# Altium PCB smartTarget.PcbDoc
Units mil, origin at the board's own origin, x right, y up, seen from the top; angles counter-clockwise.
Board outline 1968.5 x 1968.5 mil, 2 copper layers (Top Layer, Bottom Layer); 38 components, 26 nets, 135 pads, 256 vias.
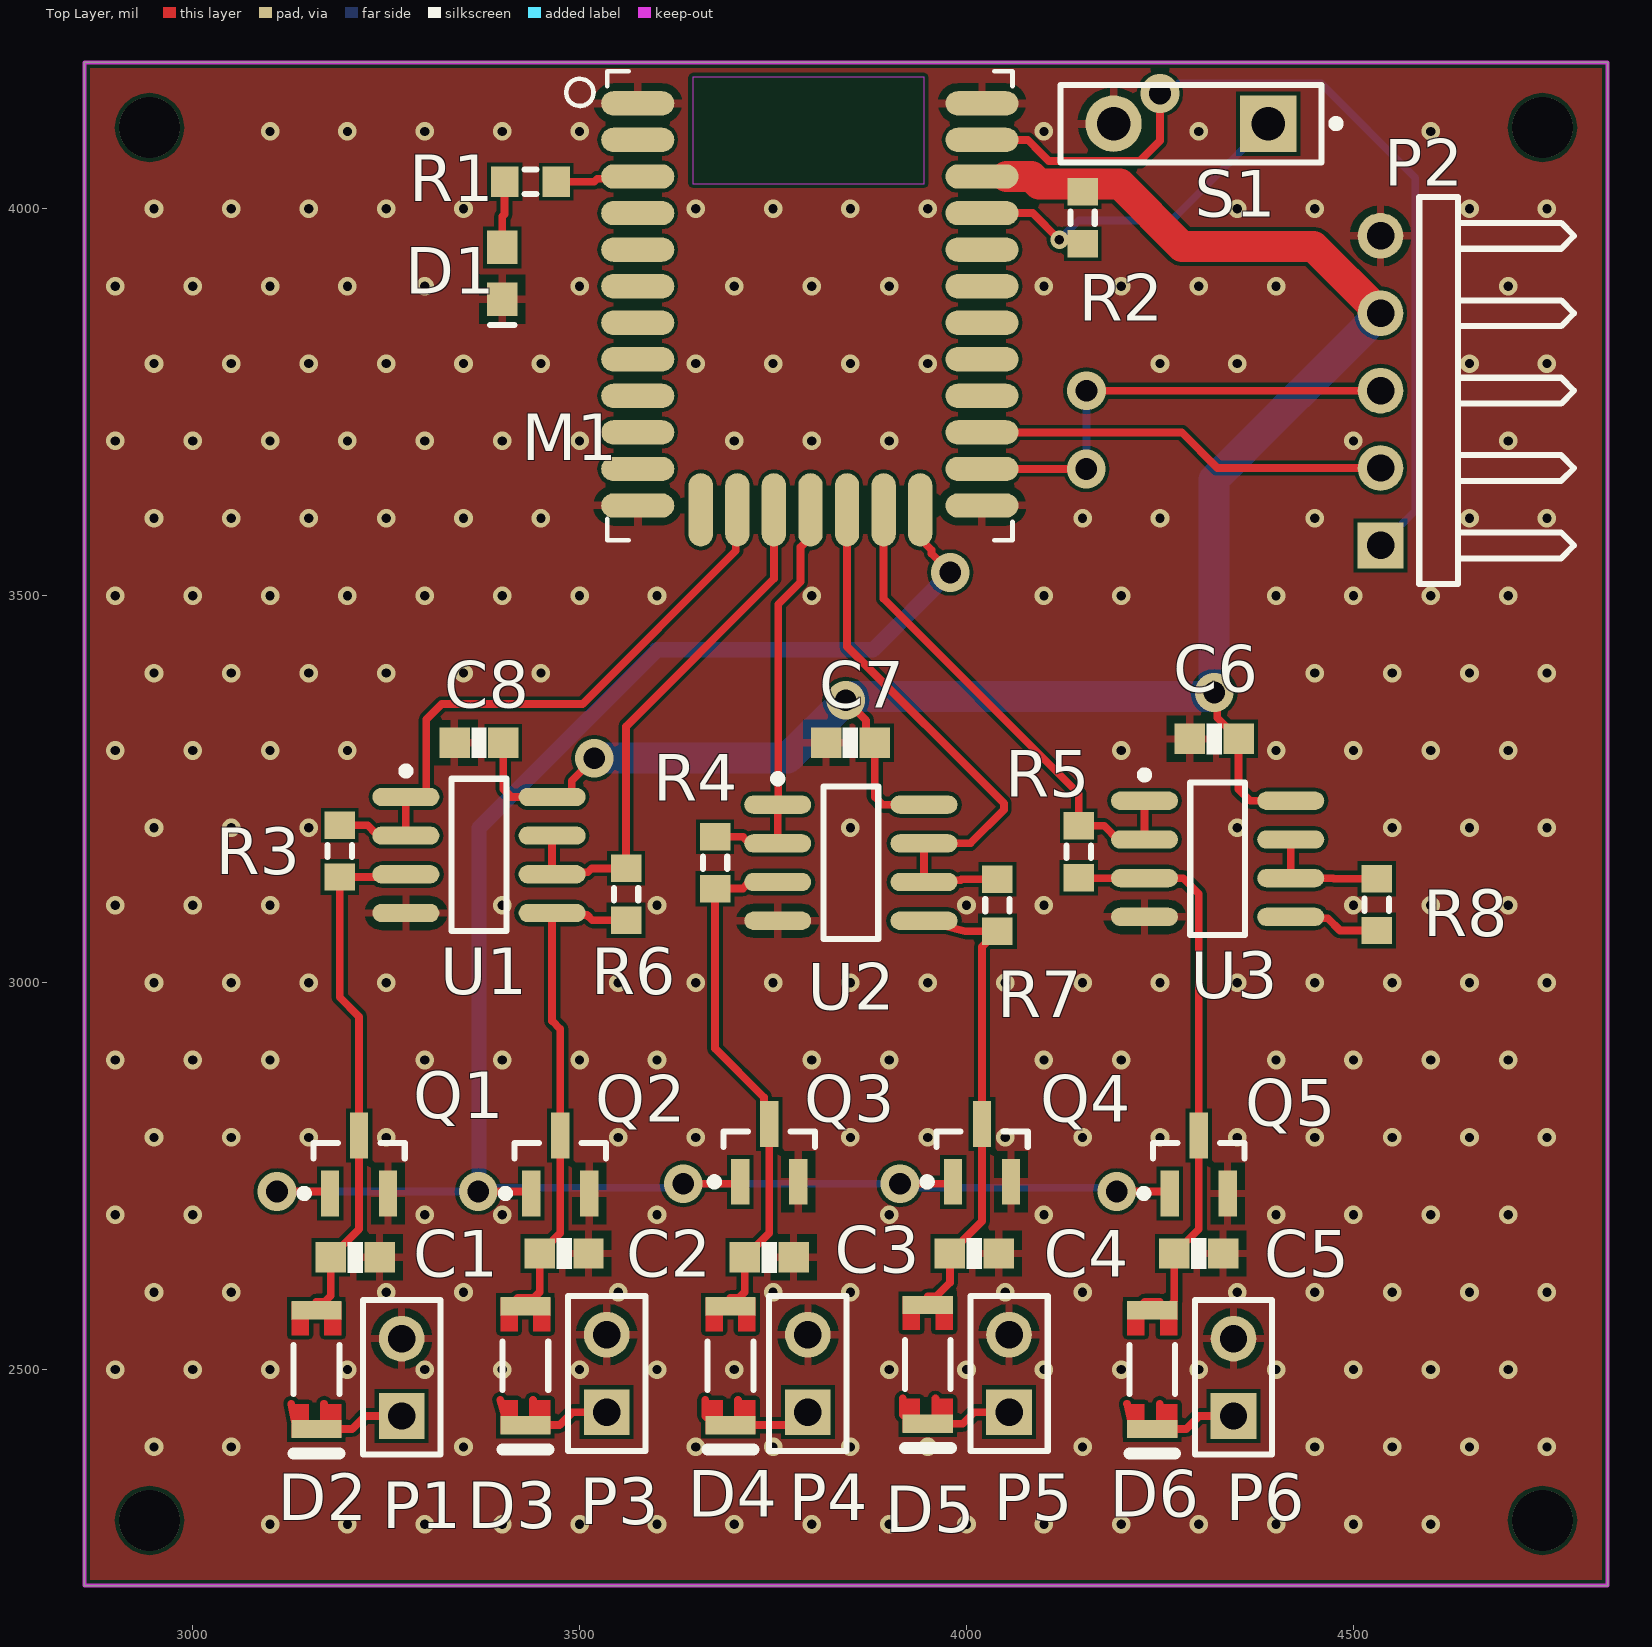
[diagram p0: Top Layer view]
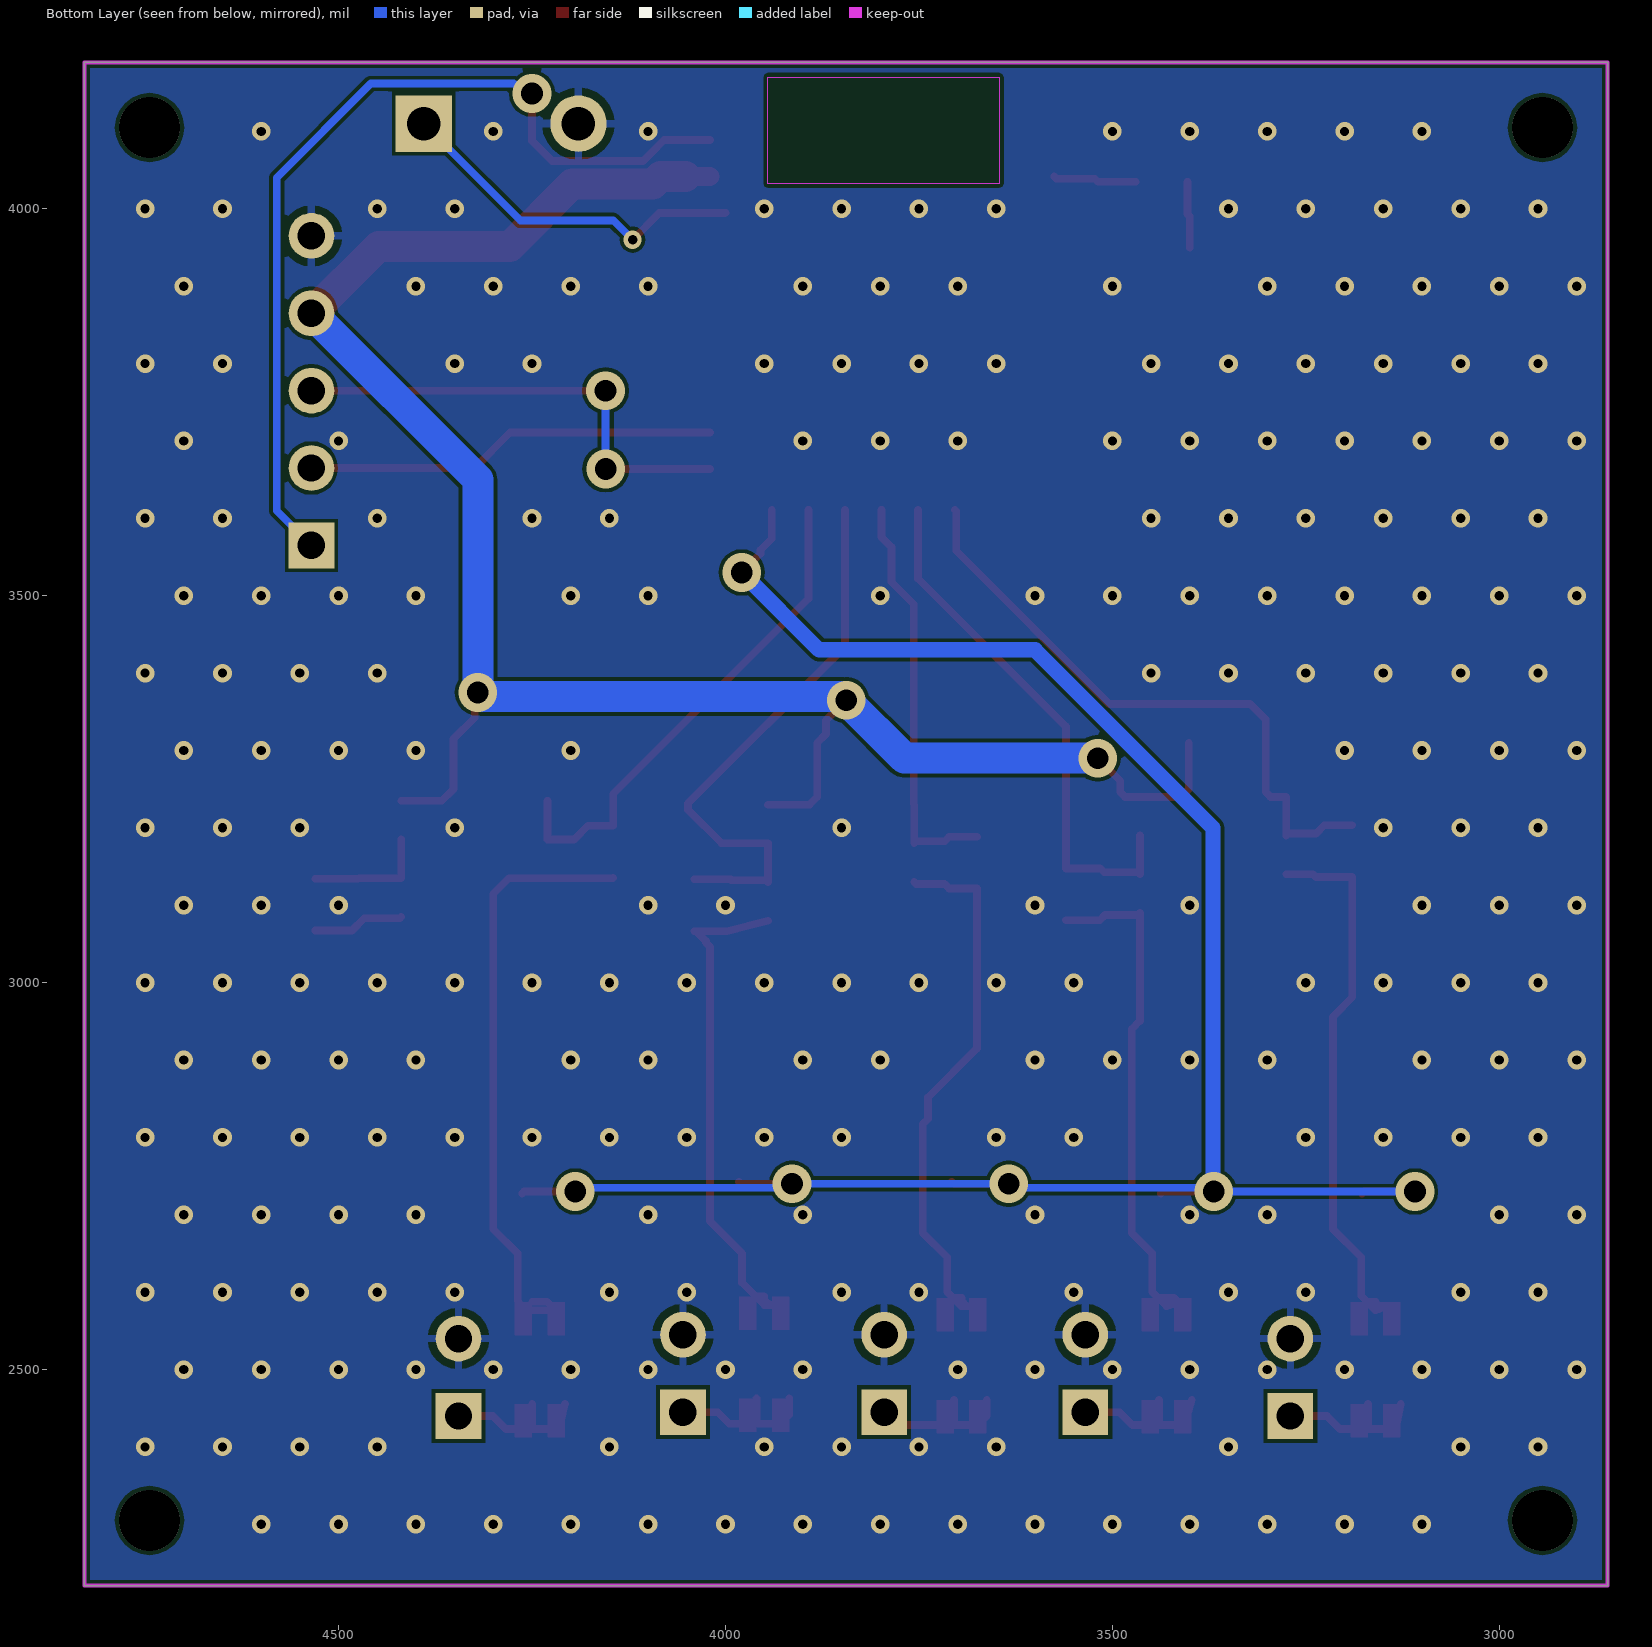
[diagram p1: Bottom Layer view, seen from below]
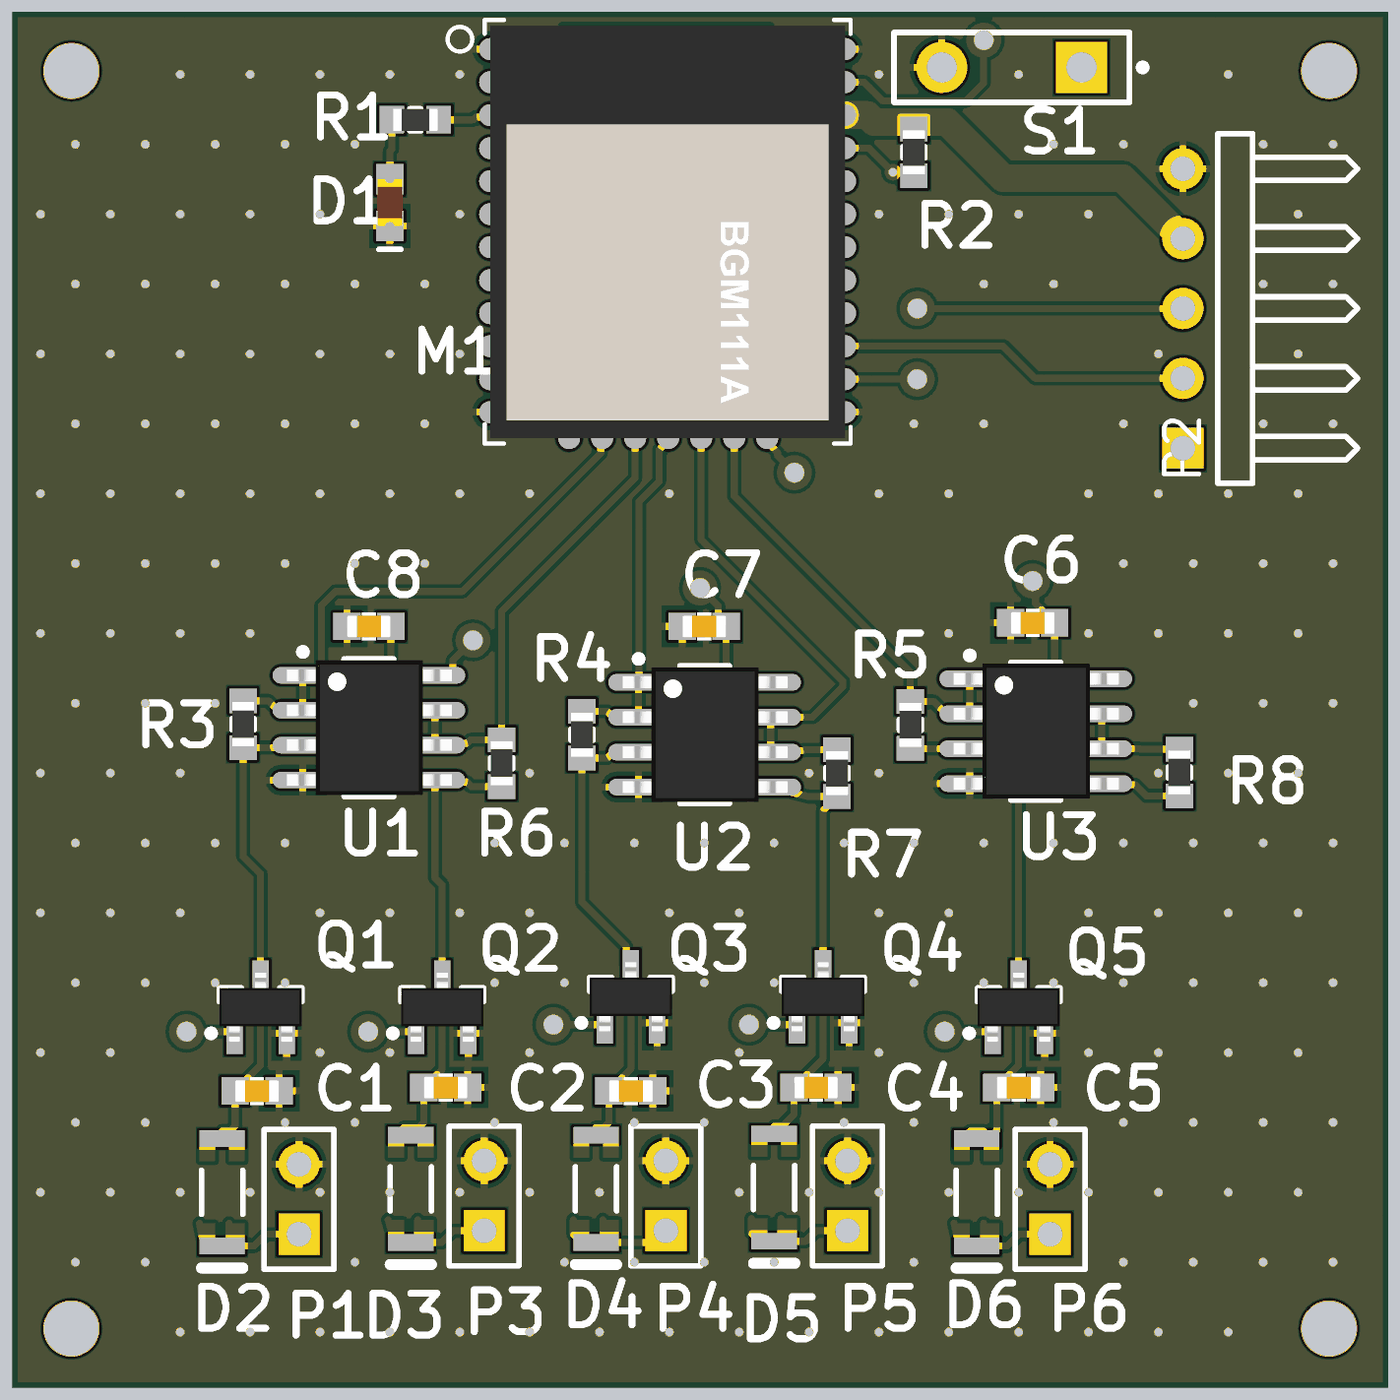
[diagram p2: 3D render of the assembled board from above, using the file's embedded part models]

## Layer stack, top to bottom
Top Solder: solder mask 0.4, Solder Resist, Dk 3.5
Top Layer: signal copper 1.4
Dielectric 1: dielectric 12.6, FR-4, Dk 4.8
Bottom Layer: signal copper 1.4
Bottom Solder: solder mask 0.4, Solder Resist, Dk 3.5

## Board outline
2860,2220.75 4828.5,2220.75 4828.5,4189.25 2860,4189.25

## Design rules (kind name [scope] priority, off if disabled: settings)
Clearance [All] p1: gap=5 ignorepadtopadclearanceinfootprint=FALSE
HoleToHoleClearance [All] p1: gap=0 allowstackedmicrovias=TRUE
MinimumSolderMaskSliver [All] p1: minsoldermaskwidth=0
PolygonConnect [All] p1: connectstyle=Relief reliefconductorwidth=10 reliefentries=4 polygonreliefangle="90 Angle" airgapwidth=10
RoutingVias [All] p1: holewidth=23.62 width=23.62 viastyle="Through Hole" minholewidth=11.81 minwidth=23.62 maxholewidth=28 maxwidth=50
SilkToSilkClearance [All] p1: silktosilkclearance=0
SilkToSolderMaskClearance [IsPad] p1: minsilkscreentomaskgap=0 clearancetoexposedcopper=TRUE
SolderMaskExpansion [All] p1: expansion=4
Width [All] p1: maxlimit=500 minlimit=5 preferedwidth=10
26 further rules are at their usual default settings.

## Components (designator, comment, footprint, x,y, rotation, side; value= is the part's Value field where it differs from the comment)
C1 "1mF" CAPC1608N 3210,2645 r180 top
C2 "1mF" CAPC1608N 3480,2650 r180 top
C3 "1mF" CAPC1608N 3745,2645 r180 top
C4 "1mF" CAPC1608N 4010,2650 r180 top
C5 "1mF" CAPC1608N 4300,2650 r180 top
C6 "100n" CAPC1608N 4320,3315 r180 top
C7 "100n" CAPC1608N 3850,3310 r180 top
C8 "100n" CAPC1608N 3370,3310 r180 top
D1 "RED" LTST-C190EKT 3400,3916.54 r270 top
D2 "FDLL4148" FAIR-LL-34_V 3160,2500 r270 top
D3 "FDLL4148" FAIR-LL-34_V 3430,2505 r270 top
D4 "FDLL4148" FAIR-LL-34_V 3695,2505 r270 top
D5 "FDLL4148" FAIR-LL-34_V 3950,2506.77 r270 top
D6 "FDLL4148" FAIR-LL-34_V 4240,2500 r270 top
M1 "BGM111A256V2" BGM111A 3543.62,3579.53 r0 top
P1 "Piezo" HDR1X2 3270,2440 r90 top
P2 "Header 5H" HDR1X5H 4535,3565 r90 top
P3 "Piezo" HDR1X2 3535,2445 r90 top
P4 "Piezo" HDR1X2 3795,2445 r90 top
P5 "Piezo" HDR1X2 4055,2445 r90 top
P6 "Piezo" HDR1X2 4345,2440 r90 top
Q1 "2N7002" SOT23-3N 3215,2765 r90 top
Q2 "2N7002" SOT23-3N 3475,2765 r90 top
Q3 "2N7002" SOT23-3N 3745,2780 r90 top
Q4 "2N7002" SOT23-3N 4020,2780 r90 top
Q5 "2N7002" SOT23-3N 4300,2765 r90 top
R1 "1k" RESC1608N 3436.54,4035 r0 top
R2 "1k" RESC1608N 4150,3988.46 r90 top
R3 "1k" RESC1608N 3190,3170 r90 top
R4 "1k" RESC1608N 3675,3155 r90 top
R5 "1k" RESC1608N 4145,3169.17 r90 top
R6 "1k" RESC1608N 3560,3114.17 r90 top
R7 "1k" RESC1608N 4040,3100 r90 top
R8 "1k" RESC1608N 4530,3100.83 r90 top
S1 "SW-SPST" SPST-2 4290,4110 r180 top
U1 "MCP6002T-I/SN" SOIC127P600-8N 3370,3165 r0 top
U2 "MCP6002T-I/SN" SOIC127P600-8N 3850.51,3155 r0 top
U3 "MCP6002T-I/SN" SOIC127P600-8N 4324.49,3160 r0 top

## Footprints (in the part's own frame and the unit in brackets; to place one, negate y for a bottom-side part, rotate by r counter-clockwise, add the part's x,y. Pads: shape width x height; smd on the part's side, far side on the other; paste and mask are expansions set on the pad)
BGM111A [mm] "Bluetooth 4.1 Module with integrated antenna 12.9x15x2mm"
  oval 2.4x0.8 smd: 1(0.8,14.14) 2(0.8,12.94) 3(0.8,11.74) 4(0.8,10.54) 5(0.8,9.34) 6(0.8,8.14) 7(0.8,6.94) 8(0.8,5.74) 9(0.8,4.54) 10(0.8,3.34) 11(0.8,2.14) 12(0.8,0.94) 20(12.1,0.94) 21(12.1,2.14) 22(12.1,3.34) 23(12.1,4.54) 24(12.1,5.74) 25(12.1,6.94) 26(12.1,8.14) 27(12.1,9.34) 28(12.1,10.54) 29(12.1,11.74) 30(12.1,12.94) 31(12.1,14.14)
  oval 0.8x2.4 smd: 13(2.87,0.8) 14(4.07,0.8) 15(5.27,0.8) 16(6.47,0.8) 17(7.67,0.8) 18(8.87,0.8) 19(10.07,0.8)
  Keep-Out Layer region: 2.6,11.5 10.2,11.5 10.2,15 2.6,15
  silkscreen extent -1.55,-0.2 13.1,15.2, body extent 0,0 12.9,15, height 2
CAPC1608N [mm] "Chip Capacitor (0603), Body 1.6x0.8mm, IPC Medium Density"
  rect 1x1 smd: 1(-0.8,0) 2(0.8,0)
  silkscreen extent -0.25,-0.51 0.25,0.51, body extent -0.8,-0.41 0.8,0.41, height 0.91
FAIR-LL-34_V [mm] "SOD, Body 3.6x1.5 mm"
  rect 0.6x1.65 smd: 1(-1.95,0) 2(1.95,0)
  Top Layer region: 1.125,-0.825 2.225,-0.825 2.225,-0.25 1.125,-0.25
  Top Layer region: -2.225,0.25 -1.125,0.25 -1.125,0.825 -2.225,0.825
  Top Layer region: -2.225,-0.825 -1.125,-0.825 -1.125,-0.25 -2.225,-0.25
  Top Layer region: 1.125,0.25 2.225,0.25 2.225,0.825 1.125,0.825
  silkscreen extent -0.8,-0.75 2.75,0.75, body extent -1.8,-0.75 1.8,0.75, height 1.5
HDR1X2 [mm] "Connector; Header; 2 Position"
  rect 1.5x1.5 hole 0.9: 1(0,0)
  round 1.5 hole 0.9: 2(2.54,0)
  silkscreen extent -1.27,-1.27 3.81,1.27
HDR1X5H [mm] "Connector; Header; 5 Position; Right Angle"
  rect 1.5x1.5 hole 0.9: 1(0,0)
  round 1.5 hole 0.9: 2(2.54,0) 3(5.08,0) 4(7.62,0) 5(10.16,0)
  silkscreen extent -1.27,-6.35 11.43,-1.27
LTST-C190EKT [mm] "Red LED, 0603"
  rect 1.1x1 smd: 1(-0.85,0) 2(0.85,0)
  silkscreen extent 1.7,-0.4 1.7,0.4, body extent -0.85,-0.45 0.85,0.45, height 0.9
RESC1608N [mm] "Chip Resistor, Body 1.6x0.8mm, IPC Medium Density"
  rect 0.9x1 smd: 1(-0.85,0) 2(0.85,0)
  silkscreen extent -0.2,-0.4 0.2,0.4, body extent -0.8,-0.4 0.8,0.4, height 0.55
SOIC127P600-8N [mm] "SOIC, 8-Leads, Body 4.9x3.9mm, Pitch 1.27mm, IPC Medium Density"
  oval 2.2x0.6 smd: 1(-2.4,1.905) 2(-2.4,0.635) 3(-2.4,-0.635) 4(-2.4,-1.905) 5(2.4,-1.905) 6(2.4,-0.635) 7(2.4,0.635) 8(2.4,1.905)
  silkscreen extent -2.52,-2.5 0.9,2.88, body extent -2.98,-2.45 3.02,2.45, height 1.75
SOT23-3N [mm] "SOT23, 3-Leads, Body 2.9x1.3mm, Pitch 0.95mm, Lead Span 2.5mm, IPC Medium Density"
  rect 1.5x0.6 smd: 1(-0.95,0.95) 2(-0.95,-0.95) 3(0.95,0)
  silkscreen extent -1.07,-1.5 0.7,1.92, body extent -1.25,-1.5 1.25,1.5, height 0.95
SPST-2 [mm] "Switch; 2 Leads"
  rect 1.85x1.85 hole 1.1: 1(-2.54,0)
  round 1.85 hole 1.1: 2(2.54,0)
  silkscreen extent -4.89,-1.27 4.28,1.27

## Part data
C1 C2 C3 C4 C5 C6 C7 C8: library part "Cap Semi", "Capacitor (Semiconductor SIM Model)", LatestRevisionDate=29-May-2009, LatestRevisionNote="IPC-7351 Footprint Added.", PackageDescription="Chip Capacitor", PackageReference=C1206, Published=8-Jun-2000, Publisher="Altium Limited"
D1: library part LED_RED, "Typical RED GaAs LED", LatestRevisionDate=08-Jul-2005, LatestRevisionNote="Mech Layer 1 removed.", PackageDescription="LED; 2 Leads", PackageReference=LED-1, Published=8-Jun-2000, Publisher="Altium Limited"
D2 D3 D4 D5 D6: library part CMP-2000-05112-1, "High Conductance Fast Diode, 500 mW, 100 V, -65 to 175 degC, 2-Pin SMD, RoHS, Tape and Reel", Manufacturer=FairchildSemiconductor, Operating Temperature=-65to175degC, Package=2LL-34, Package Description="2-Leads SOD, Body 3.6x1.5mm", Peak Average Forward Current=0.3A, Peak Forward Voltage=1@0.01AV, Peak Non-Repetitive Surge Current=4A, Peak Reverse Current=5@75VuA, Peak Reverse Repetitive Voltage=100V, Category=Rectifier, Configuration=Single, Datasheet URL=https://datasheet.ciiva.com/8053/30071-8053638.pdf, Datasheet Version=Nov-96, Manufacturer URL=https://www.fairchildsemi.com/, Mounting=SurfaceMount, Package URL=https://www.fairchildsemi.com/package-drawings/SO/SOD80A.pdf, Packaging=Tape&Reel, Peak Reverse Recovery Time=4ns, Rad Hard=No, Type=SmallSignalSwitchingDiode
M1: "Blue Gecko Bluetooth 4.1 Module with integrated antenna, 256KB Flash, 32KBRAM", Manufacturer="Silicon Labs", Manufacturer Part Number=BGM111A256V2, Supplier 1=Digi-Key, Supplier Part Number 1=BGM111A256V2
P1 P3 P4 P5 P6: library part "Header 2", "Header, 2-Pin", LatestRevisionDate=17-Jul-2002, LatestRevisionNote="Re-released for DXP Platform.", Publisher="Altium Limited"
P2: "Header, 5-Pin, Right Angle", LatestRevisionDate=17-Jul-2002, LatestRevisionNote="Re-released for DXP Platform.", Publisher="Altium Limited"
Q1 Q2 Q3 Q4 Q5: library part MOSFET-2N7002, "2N7002 300mA 60V", Supplier Part Number 1=2N7002ECT-ND, LatestRevisionDate=17-Jul-2002, LatestRevisionNote="Re-released for DXP Platform.", PackageDescription="TO, Flat Index; 3 In-Line, Axial Leads; Body Dia. 4.6mm; Lead Dia. 0.5 mm (max)", PackageReference=E3, PackageVersion=1995/1996, Published=8-Jun-2000, Publisher="Altium Limited", Supplier 1=Digi-Key
R1 R2 R3 R4 R5 R6 R7 R8: library part "Res Semi", "Semiconductor Resistor", LatestRevisionDate=17-Jul-2002, LatestRevisionNote="Re-released for DXP Platform.", PackageDescription="Axial Device, Thru-Hole; 2 Leads; 0.5 in Pin Spacing", PackageReference=AXIAL-0.5, Published=8-Jun-2000, Publisher="Altium Limited"
S1: "Single-Pole, Single-Throw Switch", LatestRevisionDate=17-Jul-2002, LatestRevisionNote="Re-released for DXP Platform.", PackageDescription="Switch; 2 Leads", PackageReference=SPST-2, Published=24-Mar-1999, Publisher="Altium Limited"
U1 U2 U3: "IC OPAMP GP 1MHZ RRO 8SOIC", Current - Input Bias=1pA, Current - Output / Channel=23mA, Current - Supply=100µA, Manufacturer="Microchip Technology", Operating Temperature="-40°C ~ 85°C", Package / Case="8-SOIC (0.154\", 3.90mm Width)", Supplier Device Package=8-SOIC, Supplier Part Number 1=MCP6002T-I/SNCT-ND, Voltage - Input Offset=4.5mV, Voltage - Supply, Single/Dual (±)="1.8 V ~ 6 V", -3db Bandwidth=-, Amplifier Type="General Purpose", Category="Integrated Circuits (ICs)", ComponentLink1Description=http://www.microchip.com/mymicrochip/filehandler.aspx?ddocname=en011705, ComponentLink1URL=http://www.microchip.com/mymicrochip/filehandler.aspx?ddocname=en011705, Gain Bandwidth Product=1MHz, Manufacturer Part Number=MCP6002T-I/SN, Mounting Type="Surface Mount", Number of Circuits=2, Output Type=Rail-to-Rail, Packaging="Cut Tape (CT)", Part Status=Active, Pricing 1="1=0.33, 25=0.28, 100=0.25 (USD)", RoHS="RoHS Compliant", Slew Rate="0.6 V/µs", Stock 1=57519, Supplier 1=Digi-Key

## Free pads (board coordinates)
  round 78.74 hole 78.74: 1(2944.25,2305) 1(2944.25,4105) 1(4744.25,2305) 1(4744.25,4105)

## Via types
v1: diameter 24, hole 12, Top Layer to Bottom Layer, tented both sides, 243 vias
v2: diameter 50, hole 28, Top Layer to Bottom Layer, tented both sides, 12 vias
v3: diameter 23.62, hole 12, Top Layer to Bottom Layer, tented both sides, 1 vias

## Nets (pads, with @x,y where several pads share a name; then routed paths per layer and width w, separated by ;. In a path a pad name is that pad's centre, name@x,y a point inside that pad or via, vN(x,y) a via of type N, cw(c..) or ccw(c..) an arc to the next point about the centre after c; other vN are vias at no path point)
BUFIN_1: C1.2 D2.1 Q1.3 R3.1 U1.3 | length 727.5
  Top Layer w10: D2.1@3169.84,2587.6 3159.84,2587.6 3159.84,2583.58 3158.42,2582.16 3143.84,2582.16 D2.1 3178.5,2595.28 C1.2 3215,2681.5 3215,2956 3190,2981 R3.1 3236.87,3136.54 3240.33,3140 U1.3
BUFIN_2: C2.2 D3.1 Q2.3 R6.1 U1.5 | length 675.9
  Top Layer w10: D3.1@3439.84,2592.6 3420.16,2592.6 3414.72,2587.16 3413.84,2587.16 D3.1 3448.5,2600.28 C2.2 3475,2676.5 3475,2940 3464.49,2950.51 U1.5 3467.09,3087.39 3509.61,3087.39 3516.29,3080.71 R6.1
BUFIN_3: C3.2 D4.1 Q3.3 R4.1 U2.3 | length 734
  Top Layer w10: D4.1@3704.84,2592.6 3694.84,2592.6 3694.84,2588.58 3688.03,2581.77 3673.35,2581.77 D4.1 3713.5,2600.28 C3.2 3745,2676.5 Q3.3 3738.19,2824.21 3738.19,2851.81 3675,2915 R4.1 3711,3121.54 3716.86,3127.39 3753.42,3127.39 U2.3
BUFIN_4: C4.2 D5.1 Q4.3 R7.1 U2.5 | length 678.1
  Top Layer w10: U2.5 3998.46,3066.54 R7.1 4038.03,3066.54 4025.31,3053.82 4025.31,3051.85 4020,3046.54 4020,2691.5 C4.2 3978.5,2612.05 D5.1 3928.35,2583.54 3943.03,2583.54 3949.84,2590.36 3949.84,2594.37 D5.1@3959.84,2594.37
BUFIN_5: C5.2 D6.1 Q5.3 R5.1 U3.3 | length 797
  Top Layer w10: R5.1 4145.71,3135 4280,3135 4300,3115 4300,2681.5 C5.2 4268.5,2588.46 4267.48,2587.43 4267.48,2582.6 4261.65,2576.77 4218.35,2576.77 4219.33,2576.77 4230.16,2587.6 D6.1@4249.84,2587.6
BUFOUT_1: M1.14 R3.2 U1.1 U1.2 | length 807.9
  Top Layer w10: R3.2 3226,3203.46 3236.86,3192.61 3272.91,3192.61 U1.2 U1.1 3295.71,3240 3302,3246.29 3302,3340 3322,3360 3503.86,3360 3701.88,3558.02 3701.88,3609.05 M1.14
BUFOUT_2: M1.15 R6.2 U1.6 U1.7 | length 691.2
  Top Layer w10: U1.7 U1.6 3467.09,3142.61 3510.61,3142.61 3515.64,3147.64 R6.2 3560,3330.9 3751.1,3522 M1.15
BUFOUT_3: M1.16 R4.2 U2.1 U2.2 | length 533.1
  Top Layer w10: R4.2 3711,3188.46 3716.86,3182.61 3753.42,3182.61 U2.2 U2.1 3756.62,3230.6 3756.62,3489 3785.59,3517.97 3785.59,3562.92 3798.35,3575.68 M1.16
BUFOUT_4: M1.17 R7.2 U2.6 U2.7 | length 739.4
  Top Layer w10: M1.17 3845.59,3434.41 4048.36,3231.64 4048.36,3223.36 4005,3180 U2.7 U2.6 3947.21,3132.21 3992.21,3132.21 3993.46,3133.46 R7.2
BUFOUT_5: M1.18 R5.2 U3.1 U3.2 | length 655.1
  Top Layer w10: M1.18 3892.83,3496.17 4145,3244 R5.2 4178,3202.64 4195.64,3185 U3.2 U3.1
GND: C1.1 C2.1 C3.1 C4.1 C5.1 C6.2 C7.2 C8.2 D1.2 M1.1 M1.12 M1.20 M1.31 P1.2 P2.5 P3.2 P4.2 P5.2 P6.2 Q1.2 Q2.2 Q3.2 Q4.2 Q5.2 S1.2 U1.4 U2.4 U3.4
  other v1: 3100,2300 3200,2300 3300,2300 3400,2300 3500,2300 3600,2300 3700,2300 3800,2300 3900,2300 4000,2300 4100,2300 4200,2300 4300,2300 4400,2300 4500,2300 4600,2300 2950,2400 3050,2400 3350,2400 3650,2400 3750,2400 3850,2400 3950,2400 4150,2400 4450,2400 4550,2400 4650,2400 4750,2400 2900,2500 3000,2500 3100,2500 3200,2500 3300,2500 3400,2500 3500,2500 3600,2500 3700,2500 3900,2500 4000,2500 4100,2500 4200,2500 4300,2500 4400,2500 4500,2500 4600,2500 4700,2500 2950,2600 3050,2600 3250,2600 3350,2600 3550,2600 3750,2600 3850,2600 4050,2600 4150,2600 4350,2600 4450,2600 4550,2600 4650,2600 4750,2600 2900,2700 3000,2700 3300,2700 3400,2700 3600,2700 3900,2700 4100,2700 4400,2700 4500,2700 4600,2700 4700,2700 2950,2800 3050,2800 3150,2800 3250,2800 3550,2800 3650,2800 3850,2800 3950,2800 4050,2800 4150,2800 4250,2800 4350,2800 4450,2800 4550,2800 4650,2800 4750,2800 2900,2900 3000,2900 3100,2900 3300,2900 3400,2900 3500,2900 3600,2900 3800,2900 3900,2900 4100,2900 4200,2900 4400,2900 4500,2900 4600,2900 4700,2900 2950,3000 3050,3000 3150,3000 3250,3000 3550,3000 3650,3000 3750,3000 3850,3000 3950,3000 4050,3000 4150,3000 4250,3000 4350,3000 4450,3000 4550,3000 4650,3000 4750,3000 2900,3100 3000,3100 3100,3100 3400,3100 3600,3100 4000,3100 4100,3100 4500,3100 4600,3100 4700,3100 2950,3200 3050,3200 3150,3200 3850,3200 4350,3200 4550,3200 4650,3200 4750,3200 2900,3300 3000,3300 3100,3300 3200,3300 4200,3300 4400,3300 4500,3300 4600,3300 4700,3300 2950,3400 3050,3400 3150,3400 3250,3400 3350,3400 3450,3400 4450,3400 4550,3400 4650,3400 4750,3400 2900,3500 3000,3500 3100,3500 3200,3500 3300,3500 3400,3500 3500,3500 3600,3500 3800,3500 4100,3500 4200,3500 4400,3500 4500,3500 4600,3500 4700,3500 2950,3600 3050,3600 3150,3600 3250,3600 3350,3600 3450,3600 4150,3600 4250,3600 4450,3600 4650,3600 4750,3600 2900,3700 3000,3700 3100,3700 3200,3700 3300,3700 3400,3700 3500,3700 3700,3700 3800,3700 3900,3700 4500,3700 4700,3700 2950,3800 3050,3800 3150,3800 3250,3800 3350,3800 3450,3800 3650,3800 3750,3800 3850,3800 3950,3800 4250,3800 4350,3800 4650,3800 4750,3800 2900,3900 3000,3900 3100,3900 3200,3900 3300,3900 3500,3900 3700,3900 3800,3900 3900,3900 4100,3900 4200,3900 4300,3900 4400,3900 4700,3900 2950,4000 3050,4000 3150,4000 3250,4000 3350,4000 3650,4000 3750,4000 3850,4000 3950,4000 4350,4000 4450,4000 4650,4000 4750,4000 3100,4100 3200,4100 3300,4100 3400,4100 3500,4100 4100,4100 4300,4100 4600,4100
GPIO_IN: M1.19 Q1.1 Q2.1 Q3.1 Q4.1 Q5.1 | length 2752.6
  Top Layer w10: v2(3109,2730) 3175.2,2730 Q1.1 ; v2(3369,2730) 3435.2,2730 Q2.1 ; v2(3634,2740) 3705,2740 Q3.1 ; v2(3914,2740) 3980,2740 Q4.1 ; M1.19 3940.08,3573.71 3954.86,3558.93 3954.86,3554.14 v2(3979,3530) ; v2(4194,2730) 4260.2,2730 Q5.1
  Bottom Layer w10: v2(3109,2730) v2(3369,2730) 3369,2734 v2@3370,2735 ; v2@3374,2735 3629,2735 v2(3634,2740) v2(3914,2740) 3919,2735 4189,2735 v2(4194,2730)
  Bottom Layer w20: v2@3370,2735 3370,3200 3600,3430 3879,3430 v2(3979,3530)
LED: M1.3 R1.2 | length 107.9
  Top Layer w10: R1.2 3519,4035 3522.93,4038.93 3572.32,4038.93 M1.3
NetD1_1: D1.1 R1.1 | length 86.3
  Top Layer w10: D1.1 3400,3990 3403.07,3993.07 R1.1
NetD2_2: D2.2 P1.1 | length 208.5
  Top Layer w10: 3127.52,2455.71 3134,2423.23 D2.2@3169.84,2423.23 ; 3169.84,2455.71 D2.2@3169.84,2423.23 ; P1.1 3222.77,2440 3206,2423.23 D2.2@3169.84,2423.23
NetD3_2: D3.2 P3.1 | length 201.3
  Top Layer w10: 3397.52,2460.71 3407,2428.23 D3.2@3439.84,2428.23 ; 3439.84,2460.71 D3.2@3439.84,2428.23 ; P3.1 3490.77,2445 3474,2428.23 D3.2@3439.84,2428.23
NetD4_2: D4.2 P4.1 | length 197.7
  Top Layer w10: 3662.52,2460.71 3662.52,2440.04 3674,2428.56 3674,2428.23 D4.2@3704.84,2428.23 ; 3704.84,2460.71 D4.2@3704.84,2428.23 ; P4.1 3778.23,2428.23 D4.2@3704.84,2428.23
NetD5_2: D5.2 P5.1 | length 202.1
  Top Layer w10: 3917.52,2462.48 3917.52,2441.81 3928.84,2430.49 3928.84,2430 D5.2@3960,2430 ; 3959.84,2462.48 3959.84,2430.16 D5.2@3960,2430 ; P5.1 4010,2445 3995,2430 D5.2@3960,2430
NetD6_2: D6.2 P6.1 | length 202.8
  Top Layer w10: 4207.52,2455.71 4215,2423.23 D6.2@4249.84,2423.23 ; 4249.84,2455.71 D6.2@4249.84,2423.23 ; P6.1 4300.77,2440 4284,2423.23 D6.2@4249.84,2423.23
NetM1_28: M1.28 R2.1 S1.1 | length 483
  Top Layer w10: M1.28@4000,3995 4000.51,3994.49 M1.28 4085.51,3994.49 v3(4120,3960) ; S1.1 S1.1@4401.56,4098.44
  Bottom Layer w10: v3(4120,3960) 4145,3985 4265,3985 S1.1
NetR8_1: R8.1 U3.5 | length 118.3
  Top Layer w10: U3.5 4420.67,3083.31 4466.69,3083.31 4482.64,3067.36 R8.1
NetR8_2: R8.2 U3.6 U3.7 | length 161.3
  Top Layer w10: U3.7 U3.6 4474,3135 4474.71,3134.29 R8.2
RESET: M1.30 P2.1 | length 1192.7
  Top Layer w10: M1.30 4079,4088.98 4096.24,4071.73 4106.16,4061.81 4223.81,4061.81 4250,4088 v2(4250,4149)
  Bottom Layer w10: v2(4250,4149) 4260.82,4149 4273.82,4162 4458,4162 4580,4040 4580,3610 P2.1
SWCLK: M1.21 P2.3 | length 616.1
  Top Layer w10: M1.21 v2(4154.78,3663.78) ; v2(4155,3765) P2.3
  Bottom Layer w10: v2(4154.78,3663.78) 4154.89,3663.89 4154.89,3764.89 v2(4155,3765)
SWDIO: M1.22 P2.2 | length 534.1
  Top Layer w10: M1.22 4278,3711.02 4324.02,3665 P2.2
VCC: C6.1 C7.1 C8.1 M1.29 P2.4 R2.2 U1.8 U2.8 U3.8 | length 2634.3
  Top Layer w10: C8.1 3401.5,3250 3411.5,3240 U1.8 3483.66,3240 3489.95,3246.29 3489.95,3260.95 v2(3519,3290) ; v2(3844,3365) 3870.17,3338.83 3870.17,3321.32 C7.1 3881.5,3240 3891.5,3230 U2.8 ; v2(4320,3375) 4324.03,3370.97 4324.03,3342.46 C6.1 4351.5,3250 4366.5,3235 U3.8
  Top Layer w25: M1.29 M1.29@4051.5,4041.73
  Top Layer w40: M1.29@4051.5,4041.73 4083.82,4041.73 4093.74,4031.81 4150,4031.81 4198.07,4031.81 4278.35,3951.54 4415,3951.54 4448.46,3951.54 P2.4
  Bottom Layer w10: v2@4315,3370 v2(4320,3375)
  Bottom Layer w40: v2(3519,3290) 3769,3290 v2(3844,3365) 3849,3370 v2@4315,3370 ; v2(4320,3375) 4320,3650 P2.4
pads on no net: M1.2 M1.4 M1.5 M1.6 M1.7 M1.8 M1.9 M1.10 M1.11 M1.13 M1.23 M1.24 M1.25 M1.26 M1.27

## Polygon pours and split planes (outlines as drawn)
GND on Top Layer "Top Layer-GND" (solid, remove dead copper, pour order 0): 2840,4205 4845,4205 4845,2205 4855,2195 2840,2195
GND on Bottom Layer "Bottom Layer-GND" (solid, remove dead copper, pour order 2): 2835,4210 4840,4210 4845,4205 4845,2180 2845,2180 2830,2195

## Keep-outs
Keep-Out Layer:
  the board outline again, w5

## Text inside footprints (layer, text, board x,y; h text height)
M1: Mechanical 1 "Copper clearance" at 3645.98,4004.72 h20